# Altium PCB IMX6.PcbDoc (part 2 of 3)
Units mil, origin at the board's own origin, x right, y up, seen from the top; angles counter-clockwise.
Board outline 7950 x 5550 mil, 4 copper layers (Top Layer, GND, VCC, Bottom Layer), stack 30.634 mil thick; 238 components, 318 nets, 1023 pads, 393 vias.
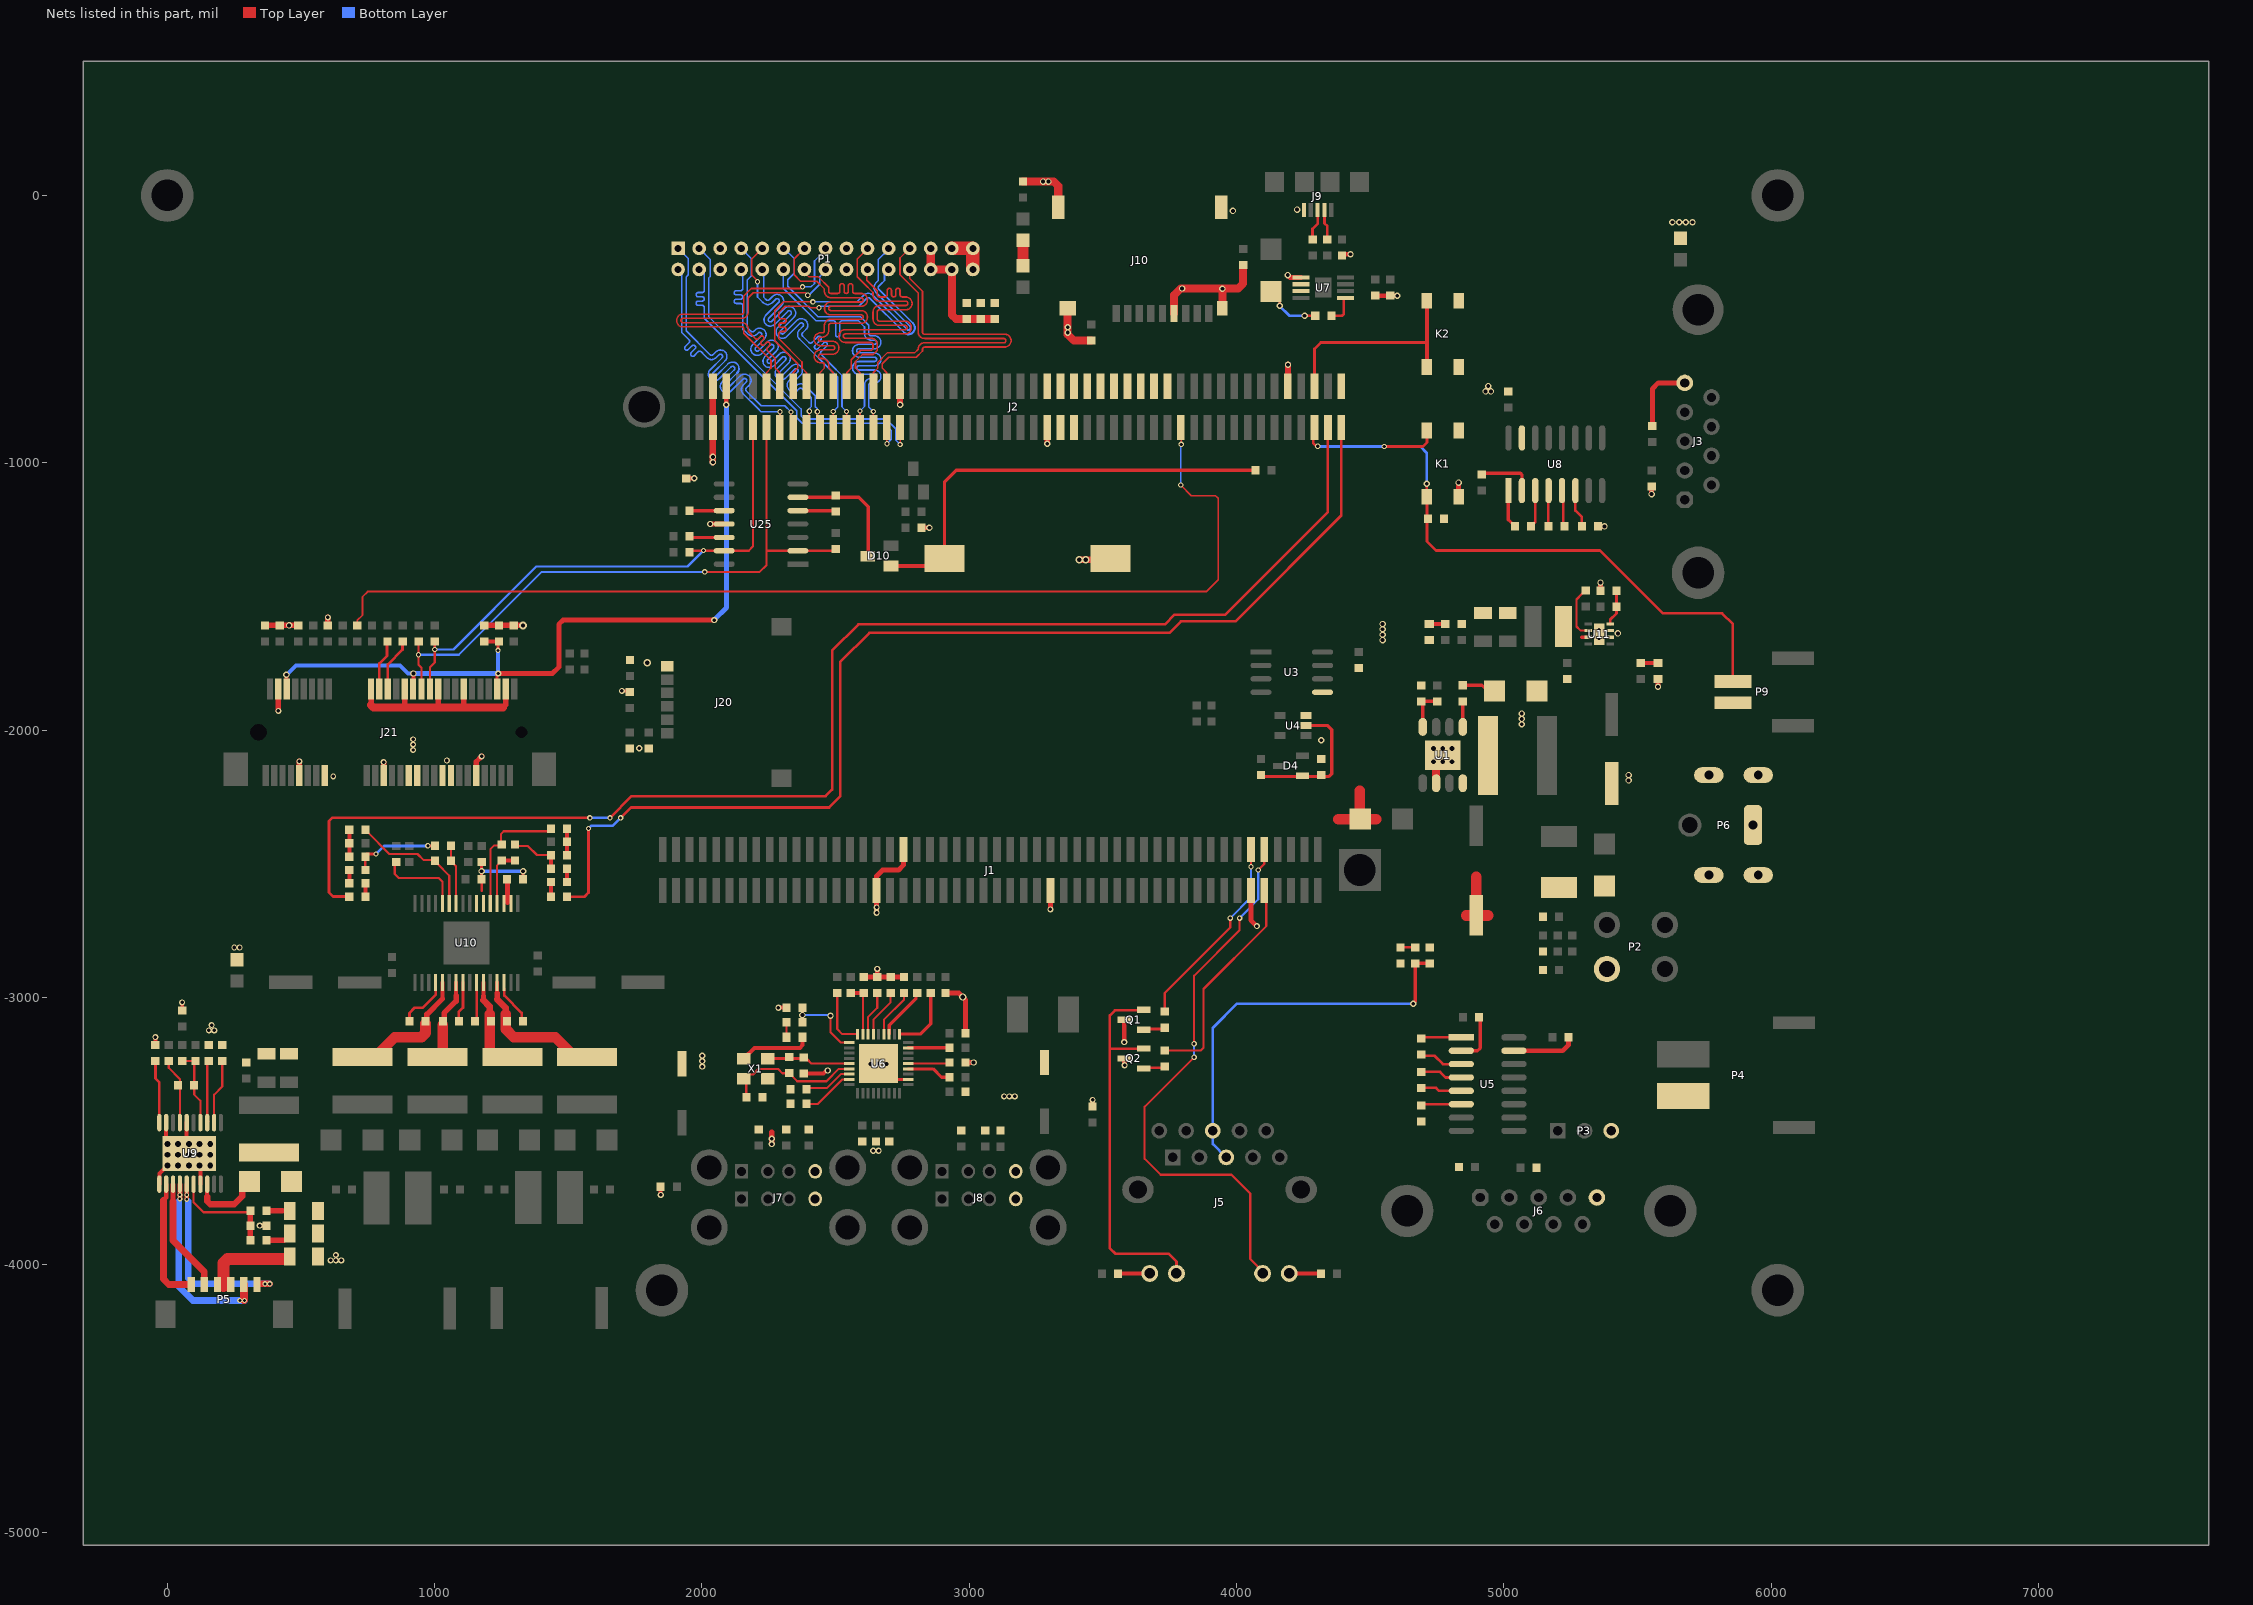
[diagram p4: the nets of this part, all layers, seen from the top]

## Via types
v1: diameter 20, hole 12, Top Layer to Bottom Layer, 140 vias
v2: diameter 24, hole 14, Top Layer to Bottom Layer, 84 vias
v3: diameter 22, hole 14, Top Layer to Bottom Layer, 57 vias
v4: diameter 23, hole 13, Top Layer to Bottom Layer, 38 vias
v5: diameter 22, hole 13, Top Layer to Bottom Layer, 21 vias
v6: diameter 30, hole 22, Top Layer to Bottom Layer, tented top, 15 vias
v7: diameter 22, hole 18, Top Layer to Bottom Layer, 6 vias
v8: diameter 20, hole 15, Top Layer to Bottom Layer, 5 vias
v9: diameter 24, hole 13, Top Layer to Bottom Layer, 5 vias
v10: diameter 18, hole 10, Top Layer to Bottom Layer, 4 vias
v11: diameter 22, hole 12, Top Layer to Bottom Layer, 3 vias
v12: diameter 28, hole 16, Top Layer to Bottom Layer, 3 vias
v13: diameter 26, hole 15, Top Layer to Bottom Layer, 3 vias
v14: diameter 18, hole 11, Top Layer to Bottom Layer, 2 vias
v15: diameter 30, hole 15, Top Layer to Bottom Layer, 2 vias
v16: diameter 30, hole 16, Top Layer to Bottom Layer, 1 vias
v17: diameter 18, hole 12, Top Layer to Bottom Layer, 1 vias
v18: diameter 28, hole 15, Top Layer to Bottom Layer, 1 vias
v19: diameter 25, hole 15, Top Layer to Bottom Layer, 1 vias
v20: diameter 28, hole 17, Top Layer to Bottom Layer, 1 vias

## Nets (pads, with @x,y where several pads share a name; then routed paths per layer and width w, separated by ;. In a path a pad name is that pad's centre, name@x,y a point inside that pad or via, vN(x,y) a via of type N, cw(c..) or ccw(c..) an arc to the next point about the centre after c; other vN are vias at no path point) (continued)
GND: BT1.2 C1.2 C2.2 C3.2 C5.2 C17.2 C18.2 C19.2 C20.1 C21.2 C22.1 C23.2 C27.2 C29.2 C30.1 C31.1 C32.1 C34.1 C35.1 C36.2 C37.1 C38.1 C39.1 C40.1 C41.1 C42.1 C43.1 C44.1 C45.1 C46.1 C47.1 C48.1 C49.1 C50.1 C52.2 C53.1 C54.1 C55.2 C57.2 C58.1 C59.1 C60.1 C61.1 C62.1 C64.1 C86.2 C87.2 C88.2 C109.2 C110.2 C111.2 C112.2 C113.2 D1.A D3.K D5.K D7.A D8.K D16.1 D17.1 D18.2 D19.2 D20.2 D21.2 D22.2 D23.1 D24.2 D25.1 D26.2 D27.1 D28.2 D29.1 D30.1 D31.2 D32.2 D33.1 J1.33 J1.38 J1.59 J1.89 J2.5 J2.6 J2.34 J2.55 J2.92 J3.5 J6.5 J7.4 J7.8 J8.4 J8.8 J9.5 J10.6 J10.10 J10.11 J10.12 J10.13 J20.1 J21.4 J21.9 J21.15 J21.18 J21.21 J21.26 J21.27 J21.29 J21.34 J21.35 J21.37 J21.40 J21.43 J21.50 K1.1 K1.2 K2.1 K2.2 L2.1 L3.1 P1.5 P1.6 P1.17 P1.18 P1.25 P1.26 P1.28 P2.2 P3.3 P4.2 P6.1 P9.2 Q1.3 Q2.3 R1.1 R15.2 R25.2 R26.2 R27.2 R28.1 R30.2 R37.1 R39.1 R43.2 R59.1 R87.1 R88.1 U1.6 U3.5 U4.3 U5.15 U6.11 U6.37 U7.1 U8.15 U9.6 U9.9 U9.11 U9.17 U9.21 U11.2 U11.3 U25.11 X1.2 X1.4 | length 6824.3
  Top Layer w12: C32.1@56,-3048 v4(56,-3018) ; v4(1701,-1853) 1733.71,-1853 1733.8,-1852.91 D32.2@1730.09,-1852.91 ; U6.37@2720.05,-3306.15 U6.11@2771.24,-3306.15
  Top Layer w15: R43.2@-44,-3178 v4(-44,-3148) ; U9.11@-29.32,-3698 -29.32,-3658.32 U9.21@-14,-3643 ; U9.21@-3.72,-3528 U9.9@-3.72,-3468 ; U9.21@73.05,-3573.16 U9.6@73.05,-3468 ; U9.17@124.23,-3698 U9.21@124.23,-3624.34 ; v4(346,-3853) R37.1@371,-3853 ; v4(1846,-3738) C30.1@1846,-3708 ; X1.4@2156,-3228.2 2196.2,-3188 2366,-3188 2376,-3178 D5.K@2376,-3148 ; v4(2286,-3038) R30.2@2316,-3038 ; C39.1@2381,-3283.52 2455.48,-3283.52 2466,-3273 v2(2471,-3273)
  Top Layer w18: C18.2@1941,-1058 v2(1971,-1058) ; v2(2031,-1229) U25.11@2083.41,-1229 ; C31.1@2606,-2923 R25.2@2656,-2923 ; v4(2653.52,-2683) 2653.52,-2545.48 2676,-2523 2736,-2523 2753.52,-2505.48 J1.38@2753.52,-2446.23 ; v4(2656,-2893) R25.2@2656,-2923 ; R27.2@2756,-2923 R26.2@2706,-2923 R25.2@2656,-2923 ; C40.1@2821,-1243 v2(2851,-1243) ; C23.2@2911,-2983 2961,-2983 2986,-3008 C109.2@2986,-3133 ; C46.1@2986,-3243 v2(3016,-3243) ; v4(3303.52,-2670.52) J1.59@3303.52,-2599.77 ; C37.1@3461,-3408 v4(3461,-3383) ; v4(3579.58,-3166.58) Q1.3@3579.58,-3083 ; v4(3581,-3253) Q2.3@3581,-3229.42 ; J1.89@4053.52,-2599.77 4053.52,-2710.52 v4(4076,-2733) ; v2(4191,-298) 4199.61,-306.61 U7.1@4241.32,-306.61 ; C47.1@4394,-220 v2(4426,-220) ; C48.1@4519,-375 C49.1@4574,-375 v2(4601,-375) ; K1.2@4830.05,-1127.02 v2(4830.05,-1073.95) ; U5.15@5037.09,-3198.91 5220.09,-3198.91 5241,-3178 C34.1@5241,-3148 ; C55.2@5351,-1238 v2(5376,-1238) ; R59.1@5361,-1478 v2(5361,-1448) ; v2(5551.91,-1117.09) D18.2@5551.91,-1088.09 ; D19.2@5555.09,-862.91 5555.09,-723.91 5577.67,-701.33 J3.5@5676,-701.33 ; v2(5576,-1838) D8.K@5576,-1808
  Top Layer w20: C44.1@366,-1608 C50.1@421,-1608 R87.1@491,-1608 ; v4(415.8,-1927.8) J21.4@415.8,-1846.58 ; J21.9@494.54,-2169.42 v5(494.54,-2116.54) ; R88.1@601,-1608 v5(601,-1578) ; 762.72,-1906.72 J21.18@762.72,-1849.58 ; J21.21@809.5,-2171.5 v5(809.5,-2119.42) ; 888.72,-1918.72 J21.26@888.72,-1858.58 ; 1013.72,-1916.72 J21.34@1013.72,-1856.58 ; 1108.72,-1906.72 J21.40@1108.72,-1846.58 ; J21.43@1155.96,-2169.42 1155.96,-2118.04 v5(1176,-2098) ; C112.2@1186,-1608 C113.2@1241,-1608 C43.1@1296,-1608 v15(1331,-1608) ; 1256,-1916 1266,-1906 J21.50@1266,-1846.78 ; v4(2261,-3548) 2261,-3503 ; v2(3291.31,-928.51) J2.55@3291.31,-867.49
  Top Layer w22: v2(2741.31,-782.69) J2.34@2741.31,-713.94 ; J2.92@4191.31,-713.94 v2(4192,-633)
  Top Layer w24: v2(2041.31,-998.31) J2.6@2041.31,-713.94 ; v12(3411,-1363) BT1.2@3524.03,-1363
  Top Layer w30: 762.72,-1906.72 772,-1916 1256,-1916 ; P1.25@2855.88,-198 P1.26@2855.88,-276.74 P1.28@2934.62,-276.74 2934.62,-446.62 2951,-463 C52.2@2991,-463 C53.1@3043,-463 C54.1@3096,-463 ; C111.2@3201,52 3316,52 3332.76,35.24 J10.12@3332.76,-44 ; J10.13@3368.2,-421.95 3368.2,-520.2 3391,-543 C110.2@3456,-543 ; J10.6@3765.83,-441.64 3765.83,-373.17 3791,-348 4006,-348 4024,-330 C21.2@4024,-260 ; J10.10@3946.94,-421.95 v2(3946.94,-348.94) ; U1.6@4746,-2198.31 U1.6@4746,-2118
  Top Layer w40: 4381,-2333 D1.A@4462.26,-2333 4521.31,-2333 ; D1.A@4461,-2307.96 4461,-2226.7 ; 4858.76,-2693 4940.02,-2693 ; C3.2@4896,-2630.24 4896,-2548.98
  other v2: 5466,-2188 5466,-2168 1766,-2068 4316,-2038 5066,-1978 5066,-1958 5066,-1938 4546,-1663 4546,-1643 5426,-1638 4546,-1623 4546,-1603 2041.31,-978 4931,-733 4951,-733 4941,-713 3368.2,-513 3368.2,-493 3796,-348 5630,-100 5655,-100 5680,-100 5705,-100 3986,-58 4226,-53 3276,52 3296,52
  other v3: 251,-2813 271,-2813 1046,-2113
  other v4: 611,-3983 631,-3983 651,-3983 631,-3963 2641,-3573 2661,-3573 2261,-3528 3130,-3370 3150,-3370 3170,-3370 2001,-3258 2001,-3238 2001,-3218 156,-3123 176,-3123 166,-3103 2653.52,-2663
  other v5: 621,-2173
  other v6: 1,-3628 41,-3628 81,-3628 121,-3628 161,-3628 1,-3588 41,-3588 81,-3588 121,-3588 161,-3588 1,-3548 41,-3548 81,-3548 121,-3548 161,-3548
  other v7: 4736,-2118 4771,-2118 4806,-2118 4736,-2068 4771,-2068 4806,-2068
  other v11: 920,-2074 920,-2054 920,-2034
  other v12: 1796,-1748 3436,-1363
  other v13: 2631,-3248 2691,-3248 2661,-3247.09
  other v14: 5356,-1658 5356,-1623
  other v19: 456,-1608
  other v20: 2976,-2998
GVDD: C73.2 R45.1 R49.2 U10.6 U10.7 | length 289
  Top Layer w10: 1176,-2600.95 R49.2@1176,-2568 ; R49.2@1176.95,-2557.96 R49.2@1177,-2559
  Top Layer w12: R49.2@1176,-2558 C73.2@1176,-2488 ; R45.1@1331,-2558 v2(1331,-2528)
  Bottom Layer w12: v2(1176,-2528) v2(1331,-2528)
HDMI_CEC: J2.59
HDMI_CLK_N: J2.72
HDMI_CLK_P: J2.74
HDMI_D0_N: J2.62
HDMI_D0_P: J2.60
HDMI_D1_N: J2.68
HDMI_D1_P: J2.70
HDMI_D2_N: J2.64
HDMI_D2_P: J2.66
HDMI_HPD: J2.57
HDMI_TX_DDC_SCL: J2.58
HDMI_TX_DDC_SDA: J2.56
HPL: C78.1 J2.97 | length 5188.9
  Top Layer w10: C78.1@684,-2622 620,-2622 605,-2607 605,-2340 617,-2328 v1(1581,-2328) ; v1(1656,-2328) 1737,-2247 2462,-2247 2487,-2222 2487,-1702 2585,-1604 3732,-1604 3768,-1568 3958,-1568 4341.31,-1184.69 J2.97@4341.31,-867.49
  Bottom Layer w10: v1(1581,-2328) v1(1656,-2328)
HPR: C85.1 J2.99 | length 4249.6
  Top Layer w10: C85.1@1497,-2623 1561,-2623 1576,-2608 v1(1576,-2368) ; v1(1696,-2328) 1735,-2289 2476,-2289 2518,-2247 2518,-1744 2626,-1636 3749,-1636 3792,-1593 3995,-1593 4391.31,-1196.69 J2.99@4391.31,-867.49
  Bottom Layer w10: v1(1576,-2368) 1586,-2358 1666,-2358 v1(1696,-2328)
I2C3_SCL: J2.13 J21.30 R90.2 R112.1 U25.2 | length 2391.3
  Top Layer w8: R90.2@940,-1669 940,-1755 951.24,-1766.24 J21.30@951.24,-1846.58 ; v1(2011,-1408) 2216,-1408 2241.31,-1382.69 J2.13@2241.31,-867.49 ; 2241.31,-1329 R112.1@2495,-1329
  Bottom Layer w8: v1(940,-1718) 1091,-1718 1401,-1408 v1(2011,-1408)
I2C3_SDA: J2.11 J21.32 R89.2 R113.1 U25.13 | length 2036.7
  Top Layer w8: J21.32@982.73,-1846.58 982.73,-1765.27 1001,-1747 R89.2@1001,-1667 ; R113.1@1954,-1334 1959,-1329 U25.13@2083.41,-1329 2175,-1329 2191.31,-1312.69 J2.11@2191.31,-867.49
  Bottom Layer w8: v1(1001,-1698) 1071,-1698 1381,-1388 1946,-1388 v1(2006,-1328)
LED_ACT: J1.92 J5.13 | length 2092.6
  Top Layer w8: v1(3841,-3223) 3656,-3408 3656,-3603 3716,-3663 3981,-3663 4051,-3733 4051,-3978 J5.13@4091,-4018 ; v1(3841,-3173) 3841,-2918 4011,-2748 v1(4011,-2703) ; v1(4081,-2523) 4103.52,-2500.48 J1.92@4103.52,-2446.23
  Bottom Layer w8: v1(3841,-3223) v1(3841,-3173) ; v1(4011,-2703) 4081,-2633 v1(4081,-2523)
LED_LINK10_100: J1.91 R14.2 | length 837.8
  Top Layer w8: R14.2@3731,-3198 3866,-3198 3876,-3188 3876,-2968 4111,-2733 4111,-2607.25 J1.91@4103.52,-2599.77
LED_LINK1000: J1.90 R13.2 | length 740.4
  Top Layer w8: R13.2@3731,-3053 3731,-2983 3976,-2738 v1(3976,-2703) ; v1(4053.52,-2510.48) J1.90@4053.52,-2446.23
  Bottom Layer w8: v1(3976,-2703) 4053.52,-2625.48 v1(4053.52,-2510.48)
LVDS0_CLK_N: J2.14 P1.15 | length 1285.2
  Top Layer w6: 2185,-348.37 2157,-376.37 2157,-435.69 cw(c2149,-435.69) 2149,-443.69 1929.36,-443.69 ccw(c1929.36,-467.69) 1929.36,-491.69 2149,-491.69 cw(c2149,-499.69) 2157,-499.69 2157,-515 2258.31,-616.31 2258.31,-645.7 2241.31,-662.7 J2.14@2241.31,-713.94 ; 2185,-348 2370,-348 v1(2376,-342)
  Bottom Layer w6: v1(2376,-342) 2408.37,-342 2421,-329.37 2421,-245 P1.15@2460,-206
LVDS0_CLK_P: J2.16 P1.16 | length 1267.4
  Top Layer w6: J2.16@2291.31,-713.94 2291.31,-662.7 2274.31,-645.7 2274.31,-609.69 2246.31,-581.69 2245.07,-580.44 cw(c2250.73,-574.78) 2245.07,-569.13 2252.41,-561.79 ccw(c2246.75,-556.13) 2252.41,-550.47 ccw(c2246.75,-556.13) 2241.1,-550.47 2233.75,-557.81 cw(c2228.1,-552.16) 2222.44,-557.81 cw(c2228.1,-552.16) 2222.44,-546.5 2229.78,-539.16 ccw(c2224.12,-533.5) 2229.78,-527.85 ccw(c2224.12,-533.5) 2218.47,-527.85 2211.13,-535.19 cw(c2205.47,-529.53) 2199.81,-535.19 2173,-508.37 2173,-499.69 ccw(c2149,-499.69) 2149,-475.69 1929.36,-475.69 cw(c1929.36,-467.69) 1929.36,-459.69 2149,-459.69 ccw(c2149,-435.69) 2173,-435.69 2173,-383 2191.63,-364.37 2387.37,-364.37 v1(2396,-373)
  Bottom Layer w6: v1(2396,-373) 2400,-373 2441,-332 2441,-303.63 P1.16@2447.31,-297.31
LVDS0_TX0_N: J2.30 P1.23 | length 1315.5
  Top Layer w6: J2.30@2641.31,-713.94 2641.31,-662.7 2658.31,-645.7 2658.31,-623.37 2692.69,-589 2795,-589 2809,-575 cw(c2833,-575) 2833,-551 ; P1.23@2777.14,-198 2741,-234.14 2741,-297 2765.83,-321.83 2809,-365 2809,-511 ccw(c2833,-511) 2833,-535 3128.5,-535 ; 2834,-551 3129,-551 ccw(c3129,-543) 3137,-543 ccw(c3129,-543) 3129,-535
LVDS0_TX0_P: J2.32 P1.24 | length 1220.3
  Top Layer w6: J2.32@2691.31,-713.94 2691.31,-662.7 2674.31,-645.7 2674.31,-630 2699.31,-605 2801.63,-605 2825,-581.63 ; P1.24@2777.14,-276.74 2777.14,-310.51 2825,-358.37 2825,-511 ccw(c2833,-511) 2833,-519 3131.5,-519 ; 2825,-581 2825,-575 cw(c2833,-575) 2833,-567 3132.5,-567 ccw(c3132.5,-543) 3156.5,-543 ccw(c3132.5,-543) 3132.5,-519
LVDS0_TX1_N: J2.18 P1.21 | length 1288.4
  Top Layer w6: J2.18@2341.31,-713.94 2341.31,-662.7 2358.31,-645.7 2358.31,-629.31 2272,-543 2272,-431.37 2305.37,-398 2381,-398 v1(2415,-398)
  Bottom Layer w6: v1(2415,-398) 2444,-398 2580.37,-398 2605.26,-373.11 cw(c2622.23,-390.08) 2639.2,-373.11 2766.85,-500.76 ; P1.21@2697,-203 2659,-241 2659,-319.37 2650.51,-327.86 ccw(c2667.49,-344.83) 2650.51,-361.8 2778.16,-489.44
  Bottom Layer w8: 2766.85,-500.76 ccw(c2772.5,-495.1) 2778.14,-500.78 ; 2778.16,-500.76 ccw(c2772.5,-495.1) 2780.5,-495.1 ccw(c2772.5,-495.1) 2778.16,-489.44
LVDS0_TX1_P: J2.20 P1.22 | length 1275.4
  Top Layer w6: J2.20@2391.31,-713.94 2391.31,-662.7 2374.31,-645.7 2374.31,-622.69 2288,-536.37 2288,-517 cw(c2296,-517) 2296,-509 2306.96,-509 ccw(c2306.96,-501) 2314.96,-501 ccw(c2306.96,-501) 2306.96,-493 2296,-493 cw(c2296,-485) 2288,-485 cw(c2296,-485) 2296,-477 2306.96,-477 ccw(c2306.96,-469) 2314.96,-469 ccw(c2306.96,-469) 2306.96,-461 2296,-461 cw(c2296,-453) 2288,-453 2288,-438 2312,-414 2399.89,-414 2405.89,-420 v1(2438,-420)
  Bottom Layer w6: v1(2438,-420) 2444,-414 2587,-414 2616.57,-384.43 cw(c2622.23,-390.08) 2627.89,-384.43 2755.53,-512.07 ; P1.22@2683,-289 2683,-318 2670.31,-330.69 2661.83,-339.17 ccw(c2667.49,-344.83) 2661.83,-350.49 2789.47,-478.13
  Bottom Layer w8: 2755.53,-512.07 ccw(c2772.5,-495.1) 2796.5,-495.1 ccw(c2772.5,-495.1) 2789.47,-478.13
LVDS0_TX2_N: J2.26 P1.19 | length 1333.8
  Top Layer w6: J2.26@2541.31,-713.94 2541.31,-662.7 2558.31,-645.7 2558.31,-614.37 2593.69,-579 2634,-579 2640,-573 2640,-558 ccw(c2632,-558) 2632,-550 2536.46,-550 cw(c2536.46,-526) 2536.46,-502 2759.54,-502 ccw(c2759.54,-494) 2767.54,-494 ccw(c2759.54,-494) 2759.54,-486 2664,-486 cw(c2664,-462) 2640,-462 2640,-435.69 cw(c2664,-435.69) 2664,-411.69 2762,-411.69 ccw(c2762,-403.69) 2770,-403.69 ccw(c2762,-403.69) 2762,-395.69 2664,-395.69 cw(c2664,-371.69) 2640,-371.69 2640,-363 2605,-328 2581,-304 2581,-238 P1.19@2614,-205 ; P1.19@2605,-212.66 P1.19@2619.66,-198
LVDS0_TX2_P: J2.28 P1.20 | length 1278.5
  Top Layer w6: J2.28@2591.31,-674 2591.31,-662.7 2574.31,-645.7 2574.31,-621 2600.31,-595 2640.63,-595 2656,-579.63 2656,-558 ccw(c2632,-558) 2632,-534 2536.46,-534 cw(c2536.46,-526) 2536.46,-518 2759.54,-518 ccw(c2759.54,-494) 2783.54,-494 ccw(c2759.54,-494) 2759.54,-470 2664,-470 cw(c2664,-462) 2656,-462 2656,-435.69 cw(c2664,-435.69) 2664,-427.69 2762,-427.69 ccw(c2762,-403.69) 2786,-403.69 ccw(c2762,-403.69) 2762,-379.69 2757,-379.69 2749,-379.69 cw(c2749,-371.69) 2741,-371.69 2741,-355.28 ccw(c2733,-355.28) 2733,-347.28 ccw(c2733,-355.28) 2725,-355.28 2725,-371.69 cw(c2717,-371.69) 2717,-379.69 cw(c2717,-371.69) 2709,-371.69 2709,-355.28 ccw(c2701,-355.28) 2701,-347.28 ccw(c2701,-355.28) 2693,-355.28 2693,-371.69 cw(c2685,-371.69) 2685,-379.69 2664,-379.69 cw(c2664,-371.69) 2656,-371.69 2656,-356.37 2616.31,-316.69 P1.20@2616.31,-280.09
LVDS0_TX3_N: J2.22 P1.13 | length 1316.7
  Top Layer w6: P1.13@2380,-202 2345,-237 2345,-297 2368.69,-320.69 2400.31,-320.69 2429.06,-320.69 2458.31,-349.94 2458.31,-358.63 ccw(c2482.31,-358.63) 2482.31,-382.63 2595.31,-382.63 cw(c2595.31,-390.63) 2603.31,-390.63 cw(c2595.31,-390.63) 2595.31,-398.63 2482.31,-398.63 ccw(c2482.31,-422.63) 2482.31,-446.63 2595.31,-446.63 cw(c2595.31,-454.63) 2603.31,-454.63 cw(c2595.31,-454.63) 2595.31,-462.63 2482.31,-462.63 ccw(c2482.31,-486.63) 2458.31,-486.63 2458.31,-505.7 cw(c2450.31,-505.7) 2450.31,-513.7 2443.84,-513.7 ccw(c2443.84,-537.7) 2443.84,-561.7 2488.79,-561.7 cw(c2488.79,-569.7) 2496.79,-569.7 cw(c2488.79,-569.7) 2488.79,-577.7 2443.84,-577.7 ccw(c2443.84,-601.7) 2443.84,-625.7 2450.31,-625.7 cw(c2450.31,-633.7) 2458.31,-633.7 2458.31,-645.7 2441.31,-662.7 J2.22@2441.31,-713.94
LVDS0_TX3_P: J2.24 P1.14 | length 1304.6
  Top Layer w6: P1.14@2389.31,-293.69 2400.31,-304.69 2435.69,-304.69 2474.31,-343.31 2474.31,-358.63 ccw(c2482.31,-358.63) 2482.31,-366.63 2508,-366.63 ccw(c2508,-358.63) 2516,-358.63 2516,-337.65 cw(c2524,-337.65) 2524,-329.65 cw(c2524,-337.65) 2532,-337.65 2532,-358.63 ccw(c2540,-358.63) 2540,-366.63 ccw(c2540,-358.63) 2548,-358.63 2548,-337.65 cw(c2556,-337.65) 2556,-329.65 cw(c2556,-337.65) 2564,-337.65 2564,-358.63 ccw(c2572,-358.63) 2572,-366.63 2580,-366.63 2581,-366.63 2595.31,-366.63 cw(c2595.31,-390.63) 2619.31,-390.63 cw(c2595.31,-390.63) 2595.31,-414.63 2482.31,-414.63 ccw(c2482.31,-422.63) 2482.31,-430.63 2595.31,-430.63 cw(c2595.31,-454.63) 2619.31,-454.63 cw(c2595.31,-454.63) 2595.31,-478.63 2482.31,-478.63 ccw(c2482.31,-486.63) 2474.31,-486.63 2474.31,-505.7 cw(c2450.31,-505.7) 2450.31,-529.7 2443.84,-529.7 ccw(c2443.84,-537.7) 2443.84,-545.7 2488.79,-545.7 cw(c2488.79,-569.7) 2512.79,-569.7 cw(c2488.79,-569.7) 2488.79,-593.7 2443.84,-593.7 ccw(c2443.84,-601.7) 2443.84,-609.7 2450.31,-609.7 cw(c2450.31,-633.7) 2474.31,-633.7 2474.31,-645.7 2491.31,-662.7 J2.24@2491.31,-713.94
LVDS1_CLK_N: J2.33 P1.3 | length 1300.4
  Top Layer w6: v1(2741.31,-931.31) J2.33@2741.31,-867.49 2741,-867.17 J2.33@2746,-862.17
  Bottom Layer w6: P1.3@1989.74,-198 2031,-239.26 2031,-303 2025,-309 2025,-452.37 2371,-798.37 2371,-825 2382,-836 2688.28,-836 2724.66,-872.37 2724.66,-914.66 v1(2741.31,-931.31)
LVDS1_CLK_P: J2.31 P1.4 | length 1312.2
  Top Layer w6: J2.31@2691,-867.17 J2.31@2691.31,-867.49 ; v1(2692,-928.51) 2692,-846.17 J2.31@2696,-842.17
  Bottom Layer w6: P1.4@2009,-276 2009,-339 2009,-347 2009,-355 cw(c2001,-355) 2001,-363 1986.35,-363 ccw(c1986.35,-371) 1978.35,-371 ccw(c1986.35,-371) 1986.35,-379 2001,-379 cw(c2001,-387) 2009,-387 cw(c2001,-387) 2001,-395 1986.35,-395 ccw(c1986.35,-403) 1978.35,-403 ccw(c1986.35,-403) 1986.35,-411 2001,-411 cw(c2001,-419) 2009,-419 2009,-459 2355,-805 2355,-831.63 2375.37,-852 2681.66,-852 2708.66,-879 2708.66,-911.85 v1(2692,-928.51)
LVDS1_TX0_N: J2.29 P1.11 | length 1286.8
  Top Layer w6: J2.29@2641.31,-867.49 v1(2641.31,-808)
  Bottom Layer w6: P1.11@2310,-201 2345,-236 2345,-291 2320.7,-315.3 2320.7,-340.07 2433.63,-453 2592,-453 2624.31,-485.31 2624.31,-517 ccw(c2632.31,-517) 2632.31,-525 2645.58,-525 cw(c2645.58,-549) 2669.58,-549 cw(c2645.58,-549) 2645.58,-573 2587.05,-573 ccw(c2587.05,-581) 2587.05,-589 2645.58,-589 cw(c2645.58,-613) 2669.58,-613 cw(c2645.58,-613) 2645.58,-637 2587.05,-637 ccw(c2587.05,-645) 2587.05,-653 2645.58,-653 cw(c2645.58,-677) 2669.58,-677 cw(c2645.58,-677) 2645.58,-701 2632.31,-701 ccw(c2632.31,-709) 2624.31,-709 2624.31,-791 v1(2641.31,-808)
LVDS1_TX0_P: J2.27 P1.12 | length 1295.5
  Top Layer w6: J2.27@2591,-867.17 J2.27@2591.31,-867.49 v1(2591.31,-806) v1@2591.31,-803.69
  Bottom Layer w6: P1.12@2304.7,-276.74 2304.7,-315.3 2304.7,-346.7 2427,-469 2476,-469 2484,-469 2492,-469 cw(c2492,-477) 2500,-477 2500,-520.98 ccw(c2508,-520.98) 2508,-528.98 ccw(c2508,-520.98) 2516,-520.98 2516,-477 cw(c2524,-477) 2524,-469 2532,-469 2544,-469 2585.37,-469 2608.31,-491.94 2608.31,-517 ccw(c2632.31,-517) 2632.31,-541 2645.58,-541 cw(c2645.58,-549) 2653.58,-549 cw(c2645.58,-549) 2645.58,-557 2587.05,-557 ccw(c2587.05,-581) 2587.05,-605 2645.58,-605 cw(c2645.58,-613) 2653.58,-613 cw(c2645.58,-613) 2645.58,-621 2587.05,-621 ccw(c2587.05,-645) 2587.05,-669 2645.58,-669 cw(c2645.58,-677) 2653.58,-677 cw(c2645.58,-677) 2645.58,-685 2632.31,-685 ccw(c2632.31,-709) 2608.31,-709 2608.31,-789 v1(2591.31,-806)
LVDS1_TX1_N: J2.23 P1.9 | length 1243.2
  Top Layer w6: v1(2208,-323) 2208,-319 2187,-298 2187,-236.96 P1.9@2225.96,-198 ; v1(2491,-808) 2491,-867.17 J2.23@2491.31,-867.49
  Bottom Layer w6: v1(2208,-323) 2208,-366 2208,-380 2220.69,-392.69 2229.17,-401.17 ccw(c2246.14,-384.2) 2263.11,-401.17 2275.84,-388.44 cw(c2281.5,-394.1) 2287.15,-388.44 cw(c2281.5,-394.1) 2289.5,-394.1 cw(c2281.5,-394.1) 2287.15,-399.76 2239.08,-447.83 ; 2239.07,-447.84 ccw(c2256.04,-464.81) 2273.01,-481.78 ; 2273.02,-481.77 2321.09,-433.71 cw(c2326.75,-439.36) 2332.41,-433.7 ; 2332.43,-433.72 cw(c2326.75,-439.36) 2334.75,-439.36 cw(c2326.75,-439.36) 2332.42,-445.01 2284.33,-493.09 ccw(c2301.3,-510.07) 2318.27,-527.04 2366.35,-478.95 cw(c2372.01,-484.61) 2377.64,-478.93 cw(c2372.01,-484.61) 2380.01,-484.61 cw(c2372.01,-484.61) 2377.66,-490.27 2364.94,-502.99 ccw(c2381.91,-519.97) 2364.94,-536.94 2508,-680 2508,-791 v1(2491,-808)
LVDS1_TX1_P: J2.25 P1.10 | length 1298.1
  Top Layer w6: v1(2541,-808) 2541,-867.17 J2.25@2541.31,-867.49
  Bottom Layer w6: 2232,-367.37 P1.10@2232,-278 ; 2232,-360 2232,-381.37 2240.49,-389.86 ccw(c2246.14,-384.2) 2251.8,-389.86 2264.53,-377.13 cw(c2281.5,-394.1) 2305.5,-394.1 cw(c2281.5,-394.1) 2298.47,-411.07 2250.39,-459.15 ccw(c2256.04,-464.81) 2250.38,-470.47 ; 2250.4,-470.49 ccw(c2256.04,-464.81) 2261.68,-470.49 ; 2261.71,-470.46 2309.78,-422.38 cw(c2326.75,-439.36) 2350.75,-439.36 cw(c2326.75,-439.36) 2343.72,-456.33 2295.65,-504.4 ccw(c2301.3,-510.07) 2295.64,-515.72 ; 2295.66,-515.74 ccw(c2301.3,-510.07) 2306.93,-515.74 ; 2306.96,-515.72 2355.04,-467.64 cw(c2372.01,-484.61) 2396.01,-484.61 cw(c2372.01,-484.61) 2388.98,-501.58 2376.25,-514.31 ccw(c2381.91,-519.97) 2376.25,-525.62 2400.63,-550 ccw(c2406.28,-544.34) 2411.94,-550 2433.01,-528.93 cw(c2438.67,-534.59) 2444.32,-528.93 cw(c2438.67,-534.59) 2444.32,-540.25 2423.25,-561.31 ccw(c2428.91,-566.97) 2423.25,-572.63 ccw(c2428.91,-566.97) 2434.57,-572.63 2455.64,-551.56 cw(c2461.29,-557.22) 2466.95,-551.56 cw(c2461.29,-557.22) 2466.95,-562.87 2445.88,-583.94 ccw(c2451.54,-589.6) 2445.88,-595.25 2483.81,-633.19 2524,-673.37 2524,-791 v1(2541,-808)
LVDS1_TX2_N: J2.21 P1.7 | length 1287.1
  Top Layer w6: v1(2432,-809) 2432,-858.17 J2.21@2441.31,-867.49
  Bottom Layer w6: P1.7@2153,-204 2185,-236 2185,-301 2169,-317 2169,-493.37 2183.31,-507.69 ccw(c2188.97,-502.03) 2194.63,-507.69 2199.17,-503.14 cw(c2216.14,-520.11) 2240.14,-520.11 cw(c2216.14,-520.11) 2233.11,-537.08 2201.4,-568.79 ccw(c2207.05,-574.46) 2201.38,-580.09 ccw(c2207.05,-574.46) 2212.69,-580.13 ; 2212.72,-580.11 2244.43,-548.4 cw(c2261.4,-565.37) 2285.4,-565.37 cw(c2261.4,-565.37) 2278.37,-582.34 2246.66,-614.05 ccw(c2252.31,-619.71) 2246.63,-625.35 ccw(c2252.31,-619.71) 2257.95,-625.39 ; 2257.97,-625.36 2289.68,-593.65 cw(c2306.65,-610.62) 2330.65,-610.62 cw(c2306.65,-610.62) 2323.62,-627.59 2291.91,-659.31 ccw(c2297.56,-664.97) 2291.91,-670.62 ; 2291.93,-670.64 ccw(c2297.56,-664.97) 2303.22,-670.62 2334.94,-638.91 cw(c2351.91,-655.88) 2375.91,-655.88 cw(c2351.91,-655.88) 2368.88,-672.85 2337.17,-704.56 ccw(c2342.82,-710.22) 2337.14,-715.86 ; 2337.16,-715.88 ccw(c2342.82,-710.22) 2348.47,-715.88 2353.02,-711.33 cw(c2369.99,-728.3) 2386.96,-711.33 2424.31,-748.69 2424.31,-790.31 2432,-798 v1(2432,-809)
LVDS1_TX2_P: J2.19 P1.8 | length 1272
  Top Layer w6: J2.19@2391.31,-867.49 2402,-856.8 v1(2402,-807)
  Bottom Layer w6: P1.8@2153,-301 2153,-317 2153,-332 2153,-340 2153,-348 cw(c2145,-348) 2145,-356 2128.67,-356 ccw(c2128.67,-364) 2120.67,-364 ccw(c2128.67,-364) 2128.67,-372 2145,-372 cw(c2145,-380) 2153,-380 cw(c2145,-380) 2145,-388 2128.67,-388 ccw(c2128.67,-396) 2120.67,-396 ccw(c2128.67,-396) 2128.67,-404 2145,-404 cw(c2145,-412) 2153,-412 2153,-483 2153,-500 2172,-519 ccw(c2188.97,-502.03) 2205.94,-519 2210.48,-514.46 cw(c2216.14,-520.11) 2221.78,-514.44 cw(c2216.14,-520.11) 2224.14,-520.11 cw(c2216.14,-520.11) 2221.81,-525.76 ; 2221.79,-525.78 2190.09,-557.48 ccw(c2207.05,-574.46) 2224.02,-591.43 ; 2224.03,-591.42 2255.73,-559.72 cw(c2261.4,-565.37) 2267.05,-559.71 ; 2267.05,-571.03 2235.34,-602.73 ccw(c2252.31,-619.71) 2269.28,-636.68 ; 2267.06,-571.02 ccw(c2261.4,-565.37) 2269.4,-565.37 ccw(c2261.4,-565.37) 2267.07,-559.73 ; 2269.29,-636.67 2300.99,-604.97 cw(c2306.65,-610.62) 2312.31,-604.97 ; 2312.33,-604.99 cw(c2306.65,-610.62) 2314.65,-610.62 cw(c2306.65,-610.62) 2312.31,-616.28 2280.59,-648 ccw(c2297.56,-664.97) 2314.53,-681.94 2346.24,-650.23 ; 2346.25,-650.22 cw(c2351.91,-655.88) 2357.54,-650.2 cw(c2351.91,-655.88) 2359.91,-655.88 cw(c2351.91,-655.88) 2357.57,-661.53 2325.85,-693.24 ccw(c2342.82,-710.22) 2359.79,-727.19 2364.33,-722.65 cw(c2369.99,-728.3) 2375.65,-722.65 2408.31,-755.31 2408.31,-791 2402,-797.31 v1(2402,-807)
LVDS1_TX3_N: J2.17 P1.1 | length 1271.7
  Top Layer w6: v1(2333,-810) 2333,-855.8 2343,-865.8 J2.17@2341.31,-867.49 J2.17@2341,-867.17
  Bottom Layer w6: P1.1@1929,-216 1949,-236 1949,-297 1941,-305 1941,-506.37 2030.31,-595.69 ccw(c2035.97,-590.03) 2041.63,-595.69 2052.36,-584.95 cw(c2069.33,-601.93) 2093.33,-601.93 cw(c2069.33,-601.93) 2086.3,-618.9 2042.22,-662.98 ccw(c2047.87,-668.64) 2042.21,-674.3 ; 2042.23,-674.32 ccw(c2047.87,-668.64) 2053.5,-674.32 ; 2053.53,-674.29 2097.61,-630.21 cw(c2114.58,-647.18) 2138.58,-647.18 ; 2087.46,-719.55 cw(c2093.12,-713.9) 2087.46,-708.25 2131.55,-664.15 ; 2087.48,-719.57 ccw(c2093.12,-713.9) 2098.76,-719.57 ; 2098.79,-719.55 2142.87,-675.46 cw(c2159.84,-692.44) 2183.84,-692.44 cw(c2159.84,-692.44) 2176.81,-709.41 2166.08,-720.14 ccw(c2171.74,-725.79) 2166.08,-731.45 2221.63,-787 2310,-787 v1(2333,-810)
  Bottom Layer w8: 2131.55,-664.15 ccw(c2114.58,-647.18) 2138.58,-647.18
LVDS1_TX3_P: J2.15 P1.2 | length 1279.9
  Top Layer w6: J2.15@2291.31,-867.49 J2.15@2292,-866.8 ; v1(2292,-809) J2.15@2292,-866.8 ; J2.15@2298,-860.8 J2.15@2292,-866.8
  Bottom Layer w6: P1.2@1925,-295 1925,-513 1940.5,-528.5 1946.16,-534.16 1951.81,-539.81 cw(c1946.16,-545.47) 1951.81,-551.13 1937.79,-565.15 ccw(c1943.45,-570.81) 1937.79,-576.47 ccw(c1943.45,-570.81) 1949.1,-576.47 1963.13,-562.44 cw(c1968.78,-568.1) 1974.44,-562.44 cw(c1968.78,-568.1) 1974.44,-573.75 1960.42,-587.78 ccw(c1966.07,-593.44) 1960.42,-599.09 ccw(c1966.07,-593.44) 1971.73,-599.09 1985.75,-585.07 cw(c1991.41,-590.73) 1997.07,-585.07 2009.5,-597.5 2019,-607 ccw(c2035.97,-590.03) 2052.94,-607 2063.67,-596.27 cw(c2069.33,-601.93) 2074.97,-596.25 ; 2074.99,-596.27 cw(c2069.33,-601.93) 2077.33,-601.93 cw(c2069.33,-601.93) 2074.99,-607.58 2030.9,-651.67 ccw(c2047.87,-668.64) 2064.84,-685.61 2108.92,-641.53 ; 2076.15,-696.93 ccw(c2093.12,-713.9) 2110.09,-730.87 2154.18,-686.78 cw(c2159.84,-692.44) 2165.48,-686.76 ; 2076.16,-696.92 2120.23,-652.84 ccw(c2114.58,-647.18) 2122.58,-647.18 ccw(c2114.58,-647.18) 2120.26,-641.54 ; 2108.95,-641.5 cw(c2114.58,-647.18) 2120.24,-641.52 ; 2165.5,-686.78 cw(c2159.84,-692.44) 2167.84,-692.44 cw(c2159.84,-692.44) 2165.5,-698.09 2154.76,-708.82 ccw(c2171.74,-725.79) 2154.76,-742.76 2210.31,-798.31 2221,-809 v1(2292,-809)
MIC: J2.100
MINIPCIE1V5: C112.1 C113.1 J2.8 J21.6 J21.28 J21.48 | length 3040.6
  Top Layer w12: J21.28@919.74,-1846.58 J21.28@921,-1845.32 ; C112.1@1186,-1673 C112.1@1191,-1668 ; J21.48@1234,-1844 1234,-1791.5 v9(1237.5,-1788) v9@1246,-1788 ; v1(1237.5,-1701.5) 1237.5,-1671.5 C113.1@1241,-1668 ; J2.8@2091,-714.26 J2.8@2091.31,-713.94
  Top Layer w15: J21.6@446,-1845.28 v2(446,-1793) ; J21.28@921,-1845.32 v2(921,-1788) ; C112.1@1191,-1668 C113.1@1241,-1668
  Top Layer w18: v9@1246,-1788 1441,-1788 1465,-1764 1465,-1604 1481,-1588 v9(2046,-1588) ; v9(2091,-783) J2.8@2091,-714.26
  Bottom Layer w12: v2(921,-1788) v2@926,-1788
  Bottom Layer w15: v2(446,-1793) 481,-1758 871,-1758 901,-1788 v2(921,-1788) ; v9(1237.5,-1788) v1(1237.5,-1701.5)
  Bottom Layer w18: v2@926,-1788 v9(1237.5,-1788) ; v9@2048.5,-1585.5 2092,-1542 v9@2092,-783
NetBT1_1: BT1.1 D10.1 R119.2 | length 1635.2
  Top Layer w12: BT1.1@2906.98,-1368 2906.98,-1072.02 2951,-1028 R119.2@4061,-1028
  Top Layer w15: D10.1@2722,-1386.06 BT1.1@2888.92,-1386.06
NetC4_1: C4.1 D7.K L1.1 U1.8 | length 86.1
  Top Layer w10: 4918,-1832 D7.K@4928,-1842
  Top Layer w12: C4.1@4846,-1832 4918,-1832
NetC4_2: C4.2 U1.1 | length 92.7
  Top Layer w12: U1.1@4846,-1987.68 C4.2@4846,-1895
NetC6_1: C6.1 U8.1 | length 123.7
  Top Layer w10: 5016,-1213 C6.1@5041,-1238
  Top Layer w12: 5016,-1213 U8.1@5016,-1124.67
NetC6_2: C6.2 U8.3 | length 140.8
  Top Layer w10: C6.2@5101,-1238 5116.91,-1222.09 U8.3@5116.91,-1103.76
NetC7_1: C7.1 U8.2 | length 216.6
  Top Layer w8: C7.1@4916,-1048 C7.1@4925.09,-1038.91
  Top Layer w12: C7.1@4925.09,-1038.91 5061.91,-1038.91 5066.91,-1043.91 U8.2@5066.91,-1103.76
NetC19_1: C19.1 J5.5 J5.6 R12.2 | length 1492.8
  Top Layer w12: v2@4668,-3016 R12.2@4668,-2872 ; R12.2@4668.04,-2871.68 C19.1@4723.86,-2871.68
  Bottom Layer w10: J5.6@3961,-3598 3911,-3548 J5.5@3911,-3498 3911,-3113 4001,-3023 v2(4661,-3023)
NetC20_2: C20.2 R12.1 | length 53.9
  Top Layer w10: C20.2@4614.18,-2811.68 R12.1@4668.04,-2811.68
NetC22_2: C22.2 D4.1 R18.1 U4.2 | length 525.4
  Top Layer w12: R18.1@4096,-2173 4346,-2173 4356,-2163 4356,-1998 4341,-1983 U4.2@4266,-1983
NetC24_1: C24.1 U5.1 | length 140.2
  Top Layer w10: C24.1@4700.09,-3148.91 U5.1@4840.24,-3148.91
NetC24_2: C24.2 U5.3 | length 162
  Top Layer w10: C24.2@4691,-3218 4741,-3218 4771.91,-3248.91 U5.3@4840.24,-3248.91
NetC25_1: C25.1 U5.2 | length 185.8
  Top Layer w12: U5.2@4840.24,-3198.91 4901,-3198.91 4911,-3188.91 C25.1@4911,-3078
NetC27_1: C27.1 U5.6 | length 145.2
  Top Layer w10: C27.1@4695.09,-3398.91 U5.6@4840.24,-3398.91
NetC28_1: C28.1 U5.4 | length 157.9
  Top Layer w10: C28.1@4691,-3278 4761,-3278 4781.91,-3298.91 U5.4@4840.24,-3298.91
NetC28_2: C28.2 U5.5 | length 153.8
  Top Layer w10: C28.2@4691,-3338 4746,-3338 4756.91,-3348.91 U5.5@4840.24,-3348.91
NetC31_2: C31.2 R24.2 U6.26 | length 192.9
  Top Layer w8: U6.26@2601.95,-3136.86 C31.2@2601.95,-2993.95
  Top Layer w15: R24.2@2556,-2983 C31.2@2606,-2983
NetC38_2: C38.2 R31.1 U6.33 X1.1 | length 482.5
  Top Layer w8: X1.1@2171,-3288 2191,-3288 2211.65,-3267.35 2285.35,-3267.35 2301,-3283 R31.1@2326,-3283 ; R31.1@2335.96,-3283.32 R31.1@2335.96,-3273.04 ; R31.1@2336,-3293 2356,-3313 2466,-3313 2512.22,-3266.78 U6.33@2550.76,-3266.78
  Top Layer w10: C38.2@2166,-3373 X1.1@2166,-3313
NetC39_2: C39.2 R31.2 U6.32 X1.3 | length 302.4
  Top Layer w8: C39.2@2386,-3233 C39.2@2391,-3233 ; C39.2@2391,-3228 2410.09,-3247.09 U6.32@2550.76,-3247.09
  Top Layer w10: X1.3@2246.55,-3228.2 C39.2@2376.32,-3228.2
NetC45_2: C45.2 U6.34 | length 185
  Top Layer w8: C45.2@2396.48,-3339.02 2419.98,-3339.02 ; 2411,-3339.02 2467.13,-3339.02 2519.68,-3286.46 U6.34@2550.76,-3286.46
NetC46_2: C46.2 U6.14 | length 164.2
  Top Layer w8: U6.14@2771.24,-3247.09 C46.2@2935.41,-3247.09
NetC52_1: C52.1 C53.2 C54.2 L4.2 L5.1 P1.27 P1.29 P1.30 | length 252.5
  Top Layer w40: L4.2@3201,-263 L5.1@3201,-168
  Top Layer w50: P1.27@2934.62,-198 P1.29@3013.36,-198 P1.30@3013.36,-276.74
NetC55_1: C55.1 U8.6 | length 144.2
  Top Layer w10: U8.6@5266.91,-1103.76 5266.91,-1178.91 5291,-1203 C55.1@5291,-1238
NetC56_1: C56.1 U8.4 | length 134.6
  Top Layer w10: C56.1@5166,-1238 5166,-1104.67 U8.4@5166.91,-1103.76
NetC56_2: C56.2 U8.5 | length 125.2
  Top Layer w10: C56.2@5221,-1243 U8.5@5221,-1117.84
NetC60_2: C60.2 C61.2 C62.2 C63.2 D11.K P5.3 P5.4 R38.2 | length 457.2
  Top Layer w20: C63.2@371,-3908 436,-3908 ; R38.2@381,-3798 431,-3798
  Top Layer w40: C60.2@447.85,-3978 C60.2@457.85,-3968
  Top Layer w45: 211,-4078 211,-3993 226,-3978 C60.2@447.85,-3978
NetC63_1: C63.1 R37.2 R38.1 U9.16 | length 422.5
  Top Layer w8: U9.16@98.64,-3698 98.64,-3765.64 136,-3803 316,-3803 R38.1@321,-3808
  Top Layer w20: C63.1@311,-3908 R38.1@311,-3793
NetC64_2: C64.2 U9.2 | length 242.7
  Top Layer w8: U9.2@175.41,-3468 175.41,-3363.59 206,-3333 C64.2@206,-3238
NetC67_1: C67.1 R47.1 RS1.1 | length 197.1
  Top Layer w8: C67.1@1302,-2433 1349,-2433 1383,-2467 RS1.1@1437,-2467
  Top Layer w15: R47.1@1436,-2516 RS1.1@1436,-2468
NetC67_2: C67.2 C69.1 U10.4 | length 211.4
  Top Layer w8: U10.4@1234.23,-2648 1234.23,-2505.77 C69.1@1252,-2488
  Top Layer w15: C69.1@1251,-2488 1252,-2488 C67.2@1295,-2488
NetC68_1: C68.1 U10.30 | length 151.9
  Top Layer w10: U10.30@1261,-2968 1261,-2993 1326,-3058 C68.1@1326,-3093
NetC68_2: C68.2 L7.1 U10.29 | length 536.4
  Top Layer w15: 1234.23,-2983.37 U10.29@1234.23,-2943.28
  Top Layer w20: 1234.23,-3006.23 1234.23,-2983.37
  Top Layer w25: 1234.23,-3006.23 1266,-3038 1266,-3063
  Top Layer w40: 1266,-3063 1266,-3118 1296,-3148 1451,-3148 1526,-3223 L7.1@1571,-3223
NetC69_2: C69.2 C71.2 U10.5 | length 492.8
  Top Layer w8: U10.5@1208.64,-2648 1208.64,-2445.36 1222,-2432 C69.2@1255,-2432 ; C69.2@1249,-2431 1249,-2388 1259,-2378 1426,-2378 C71.2@1436,-2368
NetC71_1: C71.1 R48.1 RS1.2 | length 108
  Top Layer w10: RS1.2@1496,-2476 RS1.2@1496,-2468
  Top Layer w15: RS1.2@1496,-2468 R48.1@1496,-2418 C71.1@1496,-2368
NetC74_1: C74.1 U10.26 | length 133.3
  Top Layer w10: C74.1@1157.46,-3076.54 U10.26@1157.46,-2943.28
NetC74_2: C74.2 L8.1 U10.27 | length 269.2
  Top Layer w15: 1183.05,-2994.21 U10.27@1183.05,-2943.28
  Top Layer w20: 1183.05,-3010.05 1183.05,-2994.21
  Top Layer w25: 1183.05,-3010.05 1206,-3033 1206,-3063
  Top Layer w40: L8.1@1206,-3203 1206,-3063
NetC75_1: C75.1 U10.24 | length 151.1
  Top Layer w10: C75.1@1091,-3088 1091,-3053 1106.28,-3037.72 U10.24@1106.28,-2943.28
NetC75_2: C75.2 L9.1 U10.23 | length 291.5
  Top Layer w8: L9.1@1011,-3223 L9.1@1031,-3203
  Top Layer w15: 1080.68,-2993.31 U10.23@1080.68,-2943.28
  Top Layer w20: C75.2@1036,-3088 1036,-3058 1080.68,-3013.32 1080.68,-2993.31
  Top Layer w40: L9.1@1031,-3203 C75.2@1031,-3103
NetC77_1: C77.1 R52.1 RS2.1 | length 326.9
  Top Layer w10: R52.1@741,-2513 741,-2468 746,-2463 v1(781,-2463) ; v1@975,-2433 1007,-2433 C77.1@1008,-2434
  Bottom Layer w10: v1(781,-2463) 811,-2433 v1@975,-2433
  other v1: 975,-2432
NetC77_2: C77.2 C79.1 U10.10 | length 227.7
  Top Layer w8: C79.1@1062,-2497 C77.2@1062,-2427 ; C79.1@1067,-2496 1080.68,-2509.68 U10.10@1080.68,-2648
NetC78_2: C78.2 R51.1 | length 49
  Top Layer w15: C78.2@741,-2622 R51.1@741,-2573
NetC79_2: C79.2 C81.2 U10.11 | length 471.5
  Top Layer w8: C81.2@743.5,-2380.5 748.5,-2380.5 831,-2463 936,-2463 959,-2486 998,-2486 C79.2@1001,-2489 ; C79.2@1009,-2498 1055.09,-2544.09 U10.11@1055.09,-2648
NetC81_1: C81.1 R53.1 RS2.2 | length 104
  Top Layer w15: RS2.2@681,-2477 RS2.2@681,-2473 R53.1@681,-2423 C81.1@681,-2373
NetC82_1: C82.1 U10.20 | length 202.9
  Top Layer w10: C82.1@906,-3088 906,-3058 926,-3038 956,-3038 1003.91,-2990.09 U10.20@1003.91,-2943.28
NetC82_2: C82.2 L10.1 U10.21 | length 476.2
  Top Layer w15: 1029.5,-3004.5 U10.21@1029.5,-2943.28
  Top Layer w20: C82.2@971,-3088 971,-3063 1029.5,-3004.5
  Top Layer w40: L10.1@731,-3223 776,-3223 851,-3148 951,-3148 966,-3133 C82.2@966,-3098
NetC85_2: C85.2 R46.1 | length 57
  Top Layer w15: C85.2@1436,-2625 C85.2@1436,-2623 R46.1@1436,-2568
NetD2_K: D2.K F1.1
NetD3_A: D3.A R9.1 | length 60
  Top Layer w15: D3.A@4721,-1603 R9.1@4781,-1603
NetD5_A: D5.A R29.1 | length 55
  Top Layer w8: D5.A@2316,-3148 R29.1@2316,-3093
NetD6_K: D6.K R32.2 U7.2 U7.3 | length 170.6
  Top Layer w10: v2(4161,-413) D6.K@4161,-390.74 ; v2(4254,-450) R32.2@4294,-450
  Bottom Layer w10: v2(4161,-413) 4198,-450 v2(4254,-450)
NetD8_A: D8.A R3.2 | length 65
  Top Layer w15: R3.2@5511,-1748 D8.A@5576,-1748
NetD10_3: D10.3 R116.2 U25.6 | length 447.5
  Top Layer w12: U25.6@2374,-1129 2587,-1129 2622,-1164 D10.3@2622,-1349
NetD11_A: D11.A L6.2 U9.18 | length 277.9
  Top Layer w15: 149.82,-3745.36 U9.18@149.82,-3698
  Top Layer w25: 149.82,-3745.36 149.82,-3761.82 161,-3773 251,-3773 281,-3743 281,-3714.26 D11.A@307.26,-3688
NetJ5_11: J5.11 R10.1 | length 114
  Top Layer w15: R10.1@3561,-4032.07 J5.11@3674.98,-4032.07
NetJ5_12: J5.12 Q1.2 Q2.2 | length 1427.9
  Top Layer w10: 3531,-3190.94 Q2.2@3648.42,-3190.94 ; Q1.2@3643.42,-3048 3545.21,-3048 3526,-3067.21 3526,-3938 3546,-3958 3746,-3958 3774.98,-3986.98 J5.12@3774.98,-4032.07
NetJ5_14: J5.14 R11.1 | length 113
  Top Layer w15: J5.14@4197.02,-4032.07 R11.1@4310.07,-4032.07
NetJ9_2: J9.2 R33.1 | length 115.1
  Top Layer w10: J9.2@4328.41,-54.33 4328.41,-104.41 4339,-115 R33.1@4339,-165
NetJ9_3: J9.3 R34.1 | length 118.5
  Top Layer w10: R34.1@4284,-165 4284,-125 4302.82,-106.18 J9.3@4302.82,-54.33
NetJ21_20: J21.20 R104.2 | length 190.3
  Top Layer w10: J21.20@793.76,-1846.58 793.76,-1750.24 822,-1722 R104.2@822,-1668
NetJ21_22: J21.22 R105.2 | length 200.3
  Top Layer w10: J21.22@825.25,-1846.58 825.25,-1753.75 880,-1699 R105.2@880,-1669
NetL11_1: L11.1 U11.7 | length 23.7
  Top Layer w12: 5291,-1652.25 U11.7@5314.66,-1652.25
NetP5_1: P5.1 U9.12 | length 471.5
  Top Layer w18: -14,-3758 -3.72,-3747.72 U9.12@-3.72,-3698
  Top Layer w25: -14,-3758 -14,-4053 6,-4073 P5.1@89.94,-4073
NetP5_2: P5.2 U9.13 | length 423.6
  Top Layer w18: 21.87,-3763 U9.13@21.87,-3698
  Top Layer w25: 21.87,-3763 21.87,-3908.87 139.15,-4026.15 P5.2@139.15,-4073
NetP5_5: P5.5 U9.14 | length 698.7
  Top Layer w18: v10(47.46,-3753) v10(47.46,-3738) U9.14@47.46,-3698
  Top Layer w30: v1@286.79,-4130.79 P5.5@286.79,-4073
  Bottom Layer w25: 43,-3762 43,-4080 96,-4133 v1(272,-4133) v1(289,-4133)
NetP5_6: P5.6 U9.15 | length 703.2
  Top Layer w18: v10(73.05,-3755.05) v10(73.05,-3738) U9.15@73.05,-3698
  Top Layer w25: P5.6@338,-4071 v1(384,-4071)
  Bottom Layer w25: 79,-3763 79,-4049 101,-4071 v1(384,-4071)
  other v1: 366,-4071
NetQ1_1: Q1.1 R13.1 | length 76.2
  Top Layer w10: Q1.1@3649.82,-3118 R13.1@3726,-3118
NetQ2_1: Q2.1 R14.1 | length 71.2
  Top Layer w10: Q2.1@3654.82,-3263 R14.1@3726,-3263
NetR1_2: R1.2 R2.2 U1.4 | length 153.4
  Top Layer w10: R1.2@4694,-1892 R1.2@4699,-1892 ; R1.2@4696,-1895 R1.2@4699,-1892 ; R1.2@4701,-1890 R1.2@4699,-1892 ; R2.2@4742,-1892 R2.2@4746,-1896
  Top Layer w12: U1.4@4696,-1987.68 R1.2@4696,-1895 ; R1.2@4699,-1892 R2.2@4742,-1892
NetR8_2: R8.2 U11.6 | length 181.8
  Top Layer w8: R8.2@5293,-1489 5271,-1511 5271,-1612 5285.66,-1626.66 U11.6@5314.66,-1626.66
NetR19_1: R19.1 U6.27 | length 218.8
  Top Layer w8: R19.1@2505.96,-2983.32 2505.96,-3117.96 2524.86,-3136.86 U6.27@2582.26,-3136.86
NetR20_2: R20.2 U6.13 | length 167.7
  Top Layer w12: U6.13@2771.24,-3266.78 2864.78,-3266.78 2896.04,-3298.04 R20.2@2926,-3298
NetR21_2: R21.2 U6.17 | length 154.8
  Top Layer w12: U6.17@2771.24,-3188.04 R21.2@2926,-3188
NetR22_2: R22.2 U6.19 | length 247.7
  Top Layer w12: U6.19@2739.74,-3136.86 2817.14,-3136.86 2856.04,-3097.96 R22.2@2856.04,-2982.68
NetR23_2: R23.2 U6.21 | length 190.5
  Top Layer w12: U6.21@2700.37,-3136.86 2700.37,-3103.63 2801,-3003 R23.2@2801,-2988
NetR25_1: R25.1 U6.25 | length 167.8
  Top Layer w8: U6.25@2621.63,-3136.86 2621.63,-3072.37 2655.96,-3038.04 R25.1@2655.96,-2983.32
NetR26_1: R26.1 U6.24 | length 180.3
  Top Layer w8: U6.24@2641.32,-3136.86 2641.32,-3082.68 2705.96,-3018.04 R26.1@2705.96,-2983.32
NetR27_1: R27.1 U6.22 | length 184.7
  Top Layer w8: U6.22@2680.68,-3136.86 2680.68,-3083.32 2755.96,-3008.04 R27.1@2755.96,-2983.32
NetR28_2: R28.2 U6.35 | length 197.8
  Top Layer w8: R28.2@2391,-3398 2433.6,-3398 2525.28,-3306.32 2550.59,-3306.32 U6.35@2550.76,-3306.15
NetR29_2: R29.2 R30.1 U6.28 | length 308.7
  Top Layer w8: R29.2@2376,-3093.35 R29.2@2376,-3093 R30.1@2376,-3038 ; v2(2481,-3068) 2481,-3129.44 2519.91,-3168.35 U6.28@2550.76,-3168.35
  Bottom Layer w8: v2(2376,-3065.52) 2478.52,-3065.52 v2(2481,-3068)
NetR32_1: R32.1 U7.5 | length 109.9
  Top Layer w10: R32.1@4354,-450 4394,-450 4401,-443 U7.5@4401,-383
NetR39_2: R39.2 U9.3 | length 230.4
  Top Layer w8: U9.3@153.54,-3464.28 149.82,-3460.57 149.82,-3244.18 R39.2@156,-3238
NetR40_1: R40.1 R41.1 U9.7 | length 245
  Top Layer w8: R40.1@6,-3238 6,-3263 47.46,-3304.46 47.46,-3460.57 U9.7@43.74,-3464.28
NetR41_2: R41.2 R42.1 R44.1 U9.4 | length 284.6
  Top Layer w8: R44.1@56,-3238 R42.1@106,-3238 ; R42.1@101,-3243 R41.2@101,-3328 101,-3363 124.23,-3386.23 U9.4@124.23,-3468
NetR43_1: R43.1 U9.10 | length 236.1
  Top Layer w10: R43.1@-44,-3238 -44,-3303 -29.32,-3317.68 U9.10@-29.32,-3468
NetR45_2: R45.2 U10.2 U10.3 | length 90
  Top Layer w18: 1272.41,-2644 R45.2@1272.41,-2554
NetR46_2: R46.2 R47.2 | length 49
  Top Layer w15: R46.2@1496,-2567 R47.2@1496,-2518
NetR51_2: R51.2 R52.2 | length 56
  Top Layer w15: R51.2@681,-2579 R51.2@681,-2573 R52.2@681,-2523
NetR56_2: R56.2 U10.12 | length 311.8
  Top Layer w8: R56.2@851,-2498 851,-2538 866,-2553 1016,-2553 1029.5,-2566.5 U10.12@1029.5,-2648
NetR58_1: R58.1 R59.2 U11.4 | length 134.6
  Top Layer w10: U11.4@5397.34,-1602.84 5397.34,-1586.66 5421,-1563 R58.1@5421,-1538 R59.2@5421,-1478
NetR114_1: R114.1 U25.12 | length 131.5
  Top Layer w8: R114.1@1954,-1274 R114.1@1959,-1279
  Top Layer w12: R114.1@1959,-1279 U25.12@2083.41,-1279
NetR115_1: R115.1 U25.10 | length 129.4
  Top Layer w12: R115.1@1954,-1179 U25.10@2083.41,-1179
NetR116_1: R116.1 U25.5 | length 135
  Top Layer w12: U25.5@2359,-1179 R116.1@2494,-1179
NRST_E: D33.2 J2.95 K1.3 K1.4 P9.1 | length 2493.2
  Top Layer w10: J2.95@4286,-899 4286,-926 4298,-938 v1(4303,-938) ; v1@4553,-939 4697,-939 4711.95,-924.05 K1.4@4711.95,-878.98 ; K1.3@4711,-1126.07 v2(4711,-1078) ; K1.3@4711.95,-1127.02 4711.95,-1293.95 4746,-1328 5359,-1328 5594,-1563 5816,-1563 5856,-1603 P9.1@5856,-1818
  Bottom Layer w10: v1@4304,-939 4687,-939 4711,-963 v2(4711,-1078)
  other v1: 4552,-939
ONOFF: J2.96 K2.3 K2.4 | length 815.8
  Top Layer w10: J2.96@4291.31,-713.94 4291.31,-573.69 4315,-550 4709,-550
  Top Layer w15: K2.3@4711.95,-642.02 K2.4@4711.95,-393.98
PCIE_RX_N: C116.1 J2.75 | length 3998.2
  Top Layer w7: C116.1@711,-1608 711,-1589 730.5,-1569.5 730.5,-1501.37 749.87,-1482 3887,-1482 3931,-1438 3931,-1133 3921,-1123 3831,-1123 v1(3791,-1083) ; v1(3793,-931) J2.75@3793,-890
  Bottom Layer w7: v1(3791,-1083) v1@3791,-933